# Altium PCB STM32F103C8T6核心板-外形尺寸.PcbDoc
Units mil, origin at the board's own origin, x right, y up, seen from the top; angles counter-clockwise.
Board outline 6000 x 4000 mil, 2 copper layers (Top Layer, Bottom Layer); 10 components, 0 nets, 59 pads, 24 vias.
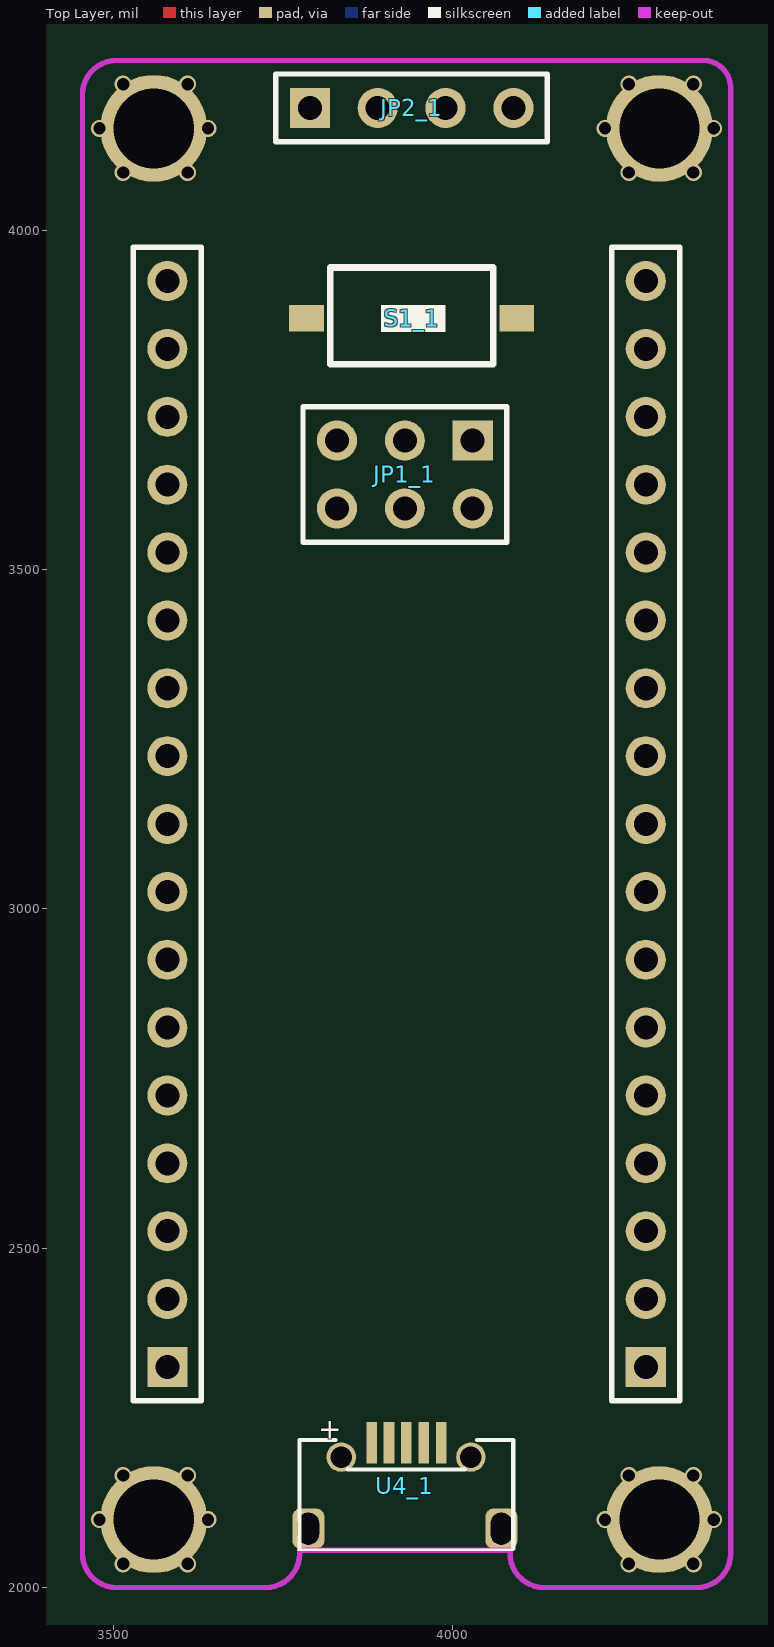
[diagram p0: Top Layer view]
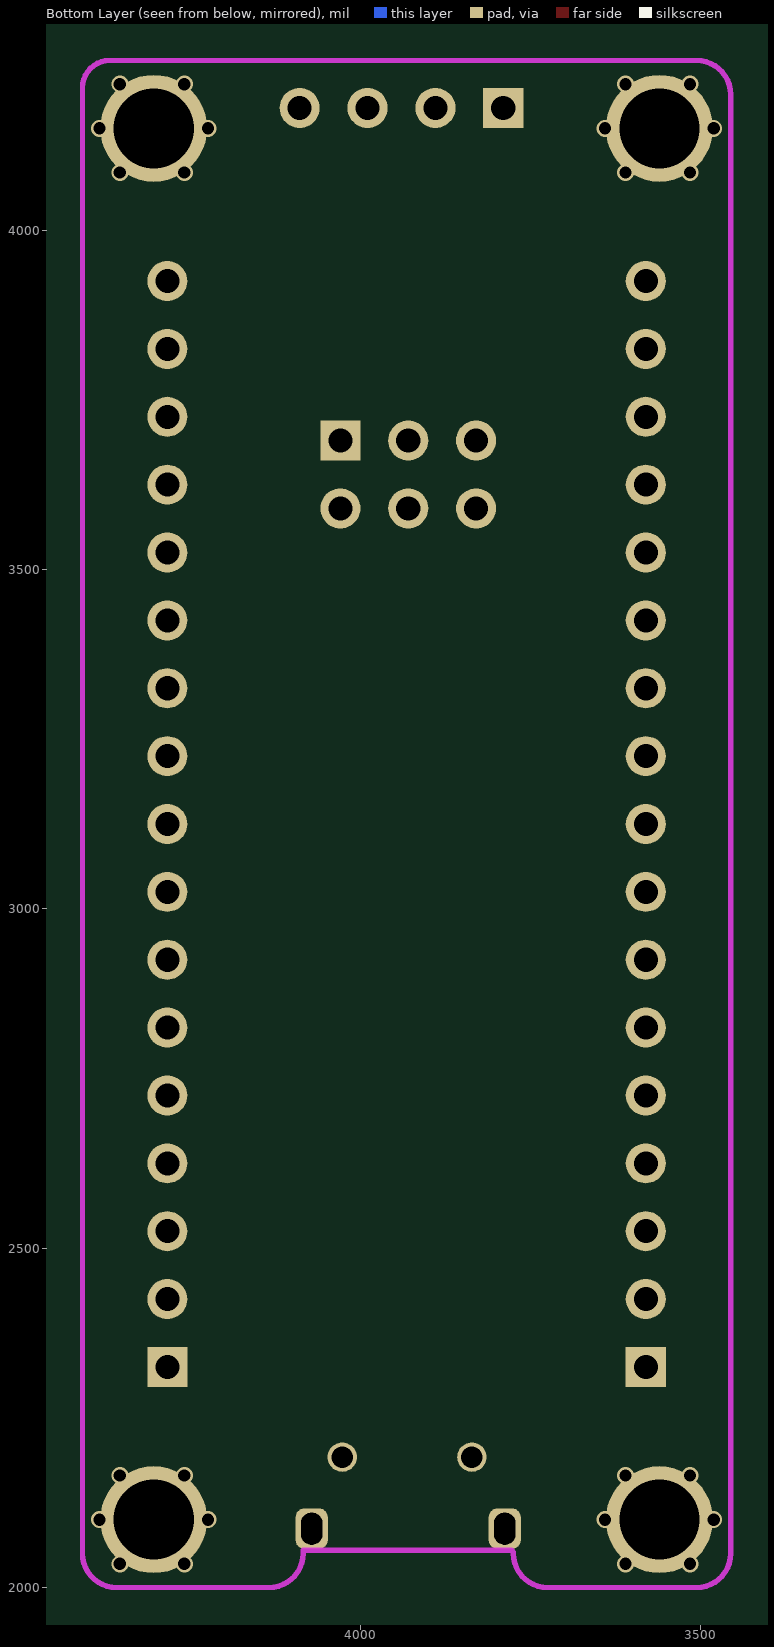
[diagram p1: Bottom Layer view, seen from below]

## Layer stack, top to bottom
Top Solder: solder mask 0.4, Solder Resist, Dk 3.5
Top Layer: signal copper 1.4
Dielectric1: dielectric 12.6, FR-4, Dk 4.8
Bottom Layer: signal copper 1.4
Bottom Solder: solder mask 0.4, Solder Resist, Dk 3.5

## Board outline
1000,1000 7000,1000 7000,5000 1000,5000

## Design rules (kind name [scope] priority, off if disabled: settings)
Clearance [All] p1: gap=10 ignorepadtopadclearanceinfootprint=FALSE except(0: Arc-Hole Track-Hole SMDPad-Hole THPad-Hole Via-Hole Fill-Hole Poly-Hole Region-Hole Text-Hole)
PolygonConnect [All] p1: connectstyle=Relief reliefconductorwidth=10 reliefentries=4 polygonreliefangle="90 Angle" airgapwidth=10
RoutingVias [All] p1: holewidth=28 width=50 viastyle="Through Hole" minholewidth=28 minwidth=50 maxholewidth=28 maxwidth=50
SolderMaskExpansion [All] p1: expansion=4
Width [All] p1: maxlimit=10 minlimit=10 preferedwidth=10
30 further rules are at their usual default settings.

## Components (designator, comment, footprint, x,y, rotation, side; value= is the part's Value field where it differs from the comment)
JP1_1 "BOOT" HDR2X3 4030,3690 r180 top (schematic designator JP1)
JP2_1 "SWD" HDR1X4 3790,4180 r0 top (schematic designator JP2)
S1_1 "SW-PB" 贴片按键 3820,3945 r0 top (schematic designator S1)
U4_1 "miniusb" USB_T 3930,2150 r180 top (schematic designator U3)
? "Comment" HDR1X17 3580,2325 r90 top
? "Comment" HDR1X17 4285,2325 r90 top
? "Comment" 铜柱 4305,4150 r90 top
? "Comment" 铜柱 4305,2100 r90 top
? "Comment" 铜柱 3560,2100 r90 top
? "Comment" 铜柱 3560,4150 r90 top

## Footprints (in the part's own frame and the unit in brackets; to place one, negate y for a bottom-side part, rotate by r counter-clockwise, add the part's x,y. Pads: shape width x height; smd on the part's side, far side on the other; paste and mask are expansions set on the pad)
HDR1X4 [mm] "Connector; Header; 4 Position"
  rect 1.5x1.5 hole 0.9: 1(0,0)
  round 1.5 hole 0.9: 2(2.54,0) 3(5.08,0) 4(7.62,0)
  silkscreen extent -1.27,-1.27 8.89,1.27
HDR1X17 [mm] "Connector; Header; 17 Position"
  rect 1.5x1.5 hole 0.9: 1(0,0)
  round 1.5 hole 0.9: 2(2.54,0) 3(5.08,0) 4(7.62,0) 5(10.16,0) 6(12.7,0) 7(15.24,0) 8(17.78,0) 9(20.32,0) 10(22.86,0) 11(25.4,0) 12(27.94,0) 13(30.48,0) 14(33.02,0) 15(35.56,0) 16(38.1,0) 17(40.64,0)
  silkscreen extent -1.27,-1.27 41.91,1.27
HDR2X3 [mm] "Connector; Header; 3x2 Position"
  rect 1.5x1.5 hole 0.9: 1(0,0)
  round 1.5 hole 0.9: 2(0,2.54) 3(2.54,0) 4(2.54,2.54) 5(5.08,0) 6(5.08,2.54)
  silkscreen extent -1.27,-1.27 6.35,3.81
USB_T [mm]
  rect 0.4x1.55 smd: 1(1.244,-1.608) 2(0.593,-1.608) 3(-0.056,-1.608) 4(-0.706,-1.608) 5(-1.356,-1.608)
  rrect50% 1.2x1.5 hole 0.8 slot 1.2 at 90 deg: 6(-3.612,1.608) 6(3.612,1.608)
  round 1.1 hole 0.8: 6(-2.469,-1.072) 6(2.382,-1.072)
  silkscreen extent -4.06,-1.71 3.99,2.39
贴片按键 [mm]
  rect 1.3x1 smd: 1(6.985,-1.905) 2(-0.889,-1.905)
  silkscreen extent 0,-3.62 6.1,0
铜柱 [mm]
  round 4 hole 3: 1(0,0)

## Part data
JP1_1: library part "HEADER 3X2"
JP2_1: library part "4 HEADER", "4 Pin Header"
U4_1: library part usb

## Via types
v1: diameter 25, hole 18, Top Layer to Bottom Layer, 24 vias

## Nets (pads, with @x,y where several pads share a name; then routed paths per layer and width w, separated by ;. In a path a pad name is that pad's centre, name@x,y a point inside that pad or via, vN(x,y) a via of type N, cw(c..) or ccw(c..) an arc to the next point about the centre after c; other vN are vias at no path point)
pads on no net: ?.1 ?.2 ?.3 ?.4 ?.5 ?.6 ?.7 ?.8 ?.9 ?.10 ?.11 ?.12 ?.13 ?.14 ?.15 ?.16 ?.17 JP1_1.1 JP1_1.2 JP1_1.3 JP1_1.4 JP1_1.5 JP1_1.6 JP2_1.1 JP2_1.2 JP2_1.3 JP2_1.4 S1_1.1 S1_1.2 U4_1.1 U4_1.2 U4_1.3 U4_1.4 U4_1.5 U4_1.6
copper on no net:
  other v1: 3515,2035 3610,2035 4260,2035 4355,2035 3480,2100 3640,2100 4225,2100 4385,2100 3515,2165 3610,2165 4260,2165 4355,2165 3515,4085 3610,4085 4260,4085 4355,4085 3480,4150 3640,4150 4225,4150 4385,4150 3515,4215 3610,4215 4260,4215 4355,4215

## Keep-outs
Keep-Out Layer:
  lines w8: 4410,2090 4410,4195 4410,4210 ccw(c4370,4210) 4370,4250 3525,4250 3505,4250 ccw(c3505,4200) 3455,4200 3455,4155 3455,2110 3455,2050 ccw(c3505,2050) 3505,2000 3725,2000 ccw(c3725,2050) 3775,2050 cw(c3780,2050) 3780,2055 4085,2055 4085,2050 ccw(c4135,2050) 4135,2000 4360,2000 ccw(c4360,2050) 4410,2050 4410,2100

## Dimensions
4090,4180 to 4410,4195 on Top Overlay
3580,2325 to 4285,2325 on Top Overlay
3560,4150 to 3560,2100 on Top Overlay
3560,4150 to 4305,4150 on Top Overlay

## Text inside footprints (layer, text, board x,y; h text height)
U4_1: Top Overlay "+" at 3802.3,2219.2 h30